# EAGLE board TSF (EAGLE 6.5.0)
CIRCULAR-LAYOUT-SETTINGS: 0.000000 0.000000 1.000000 10.000000 0 0
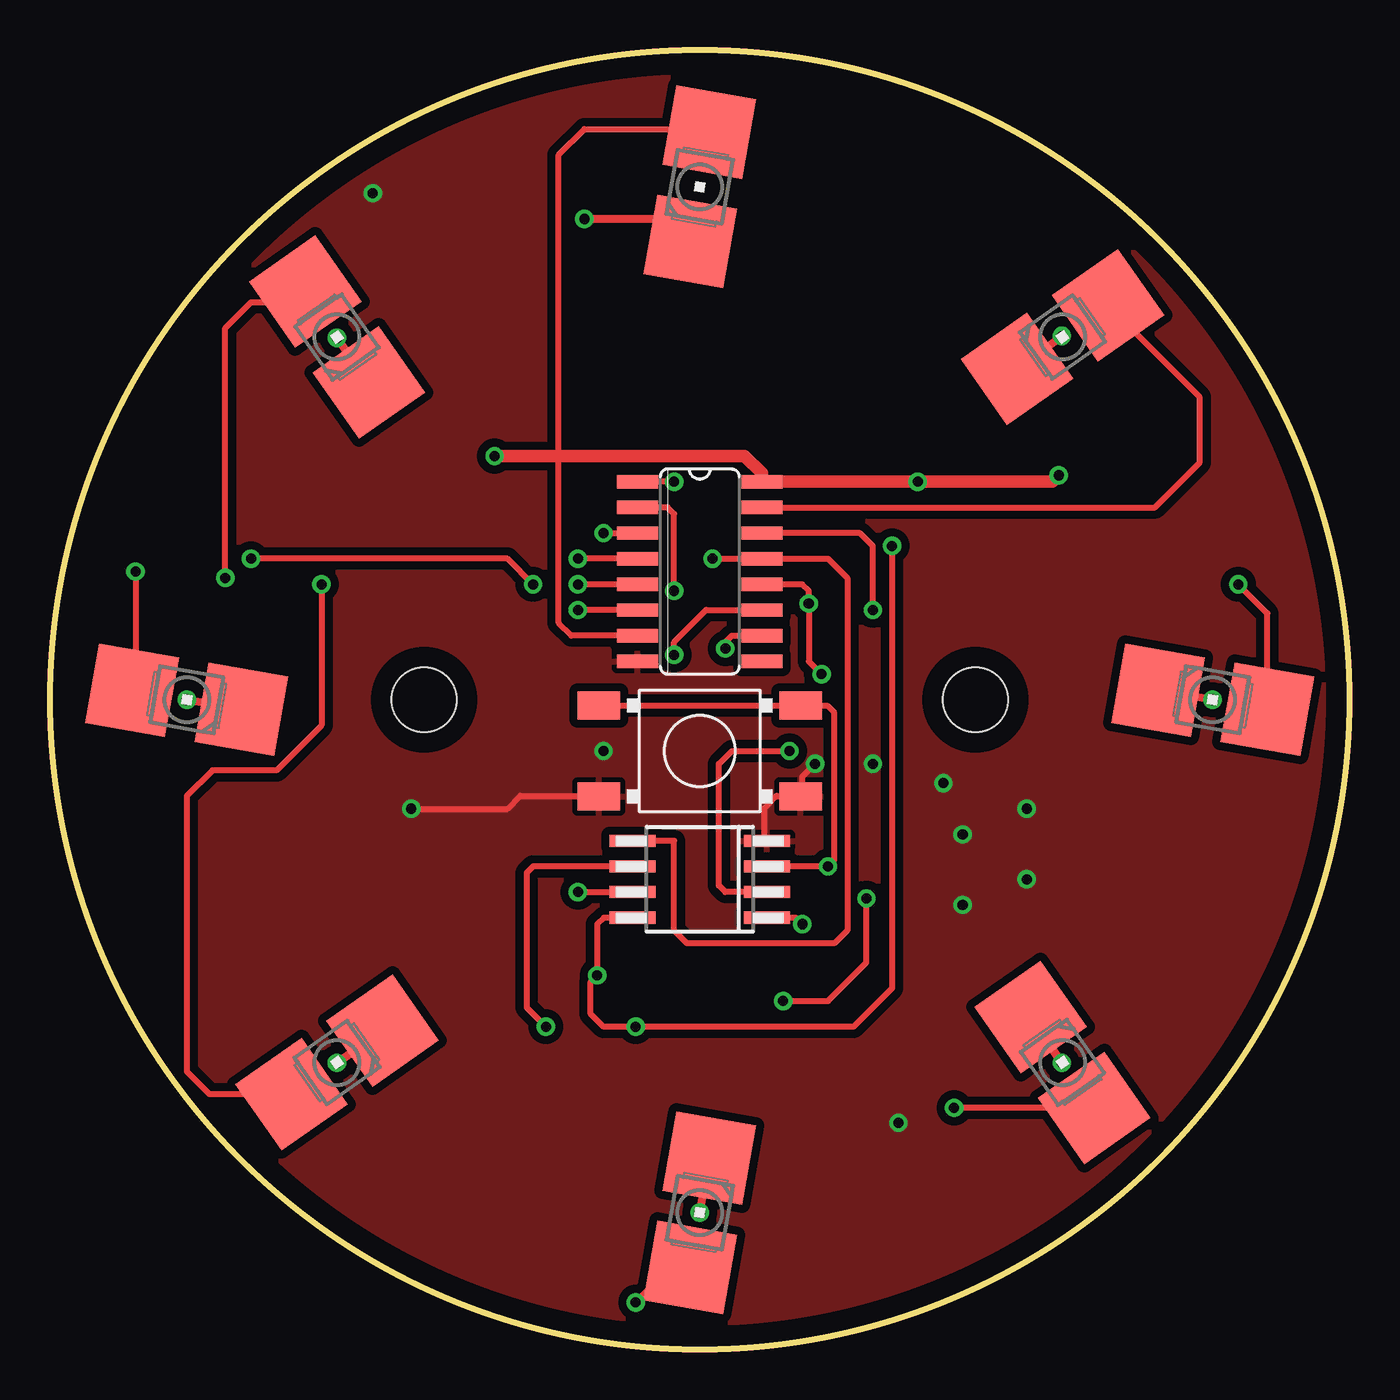
[diagram p0: board, top side]
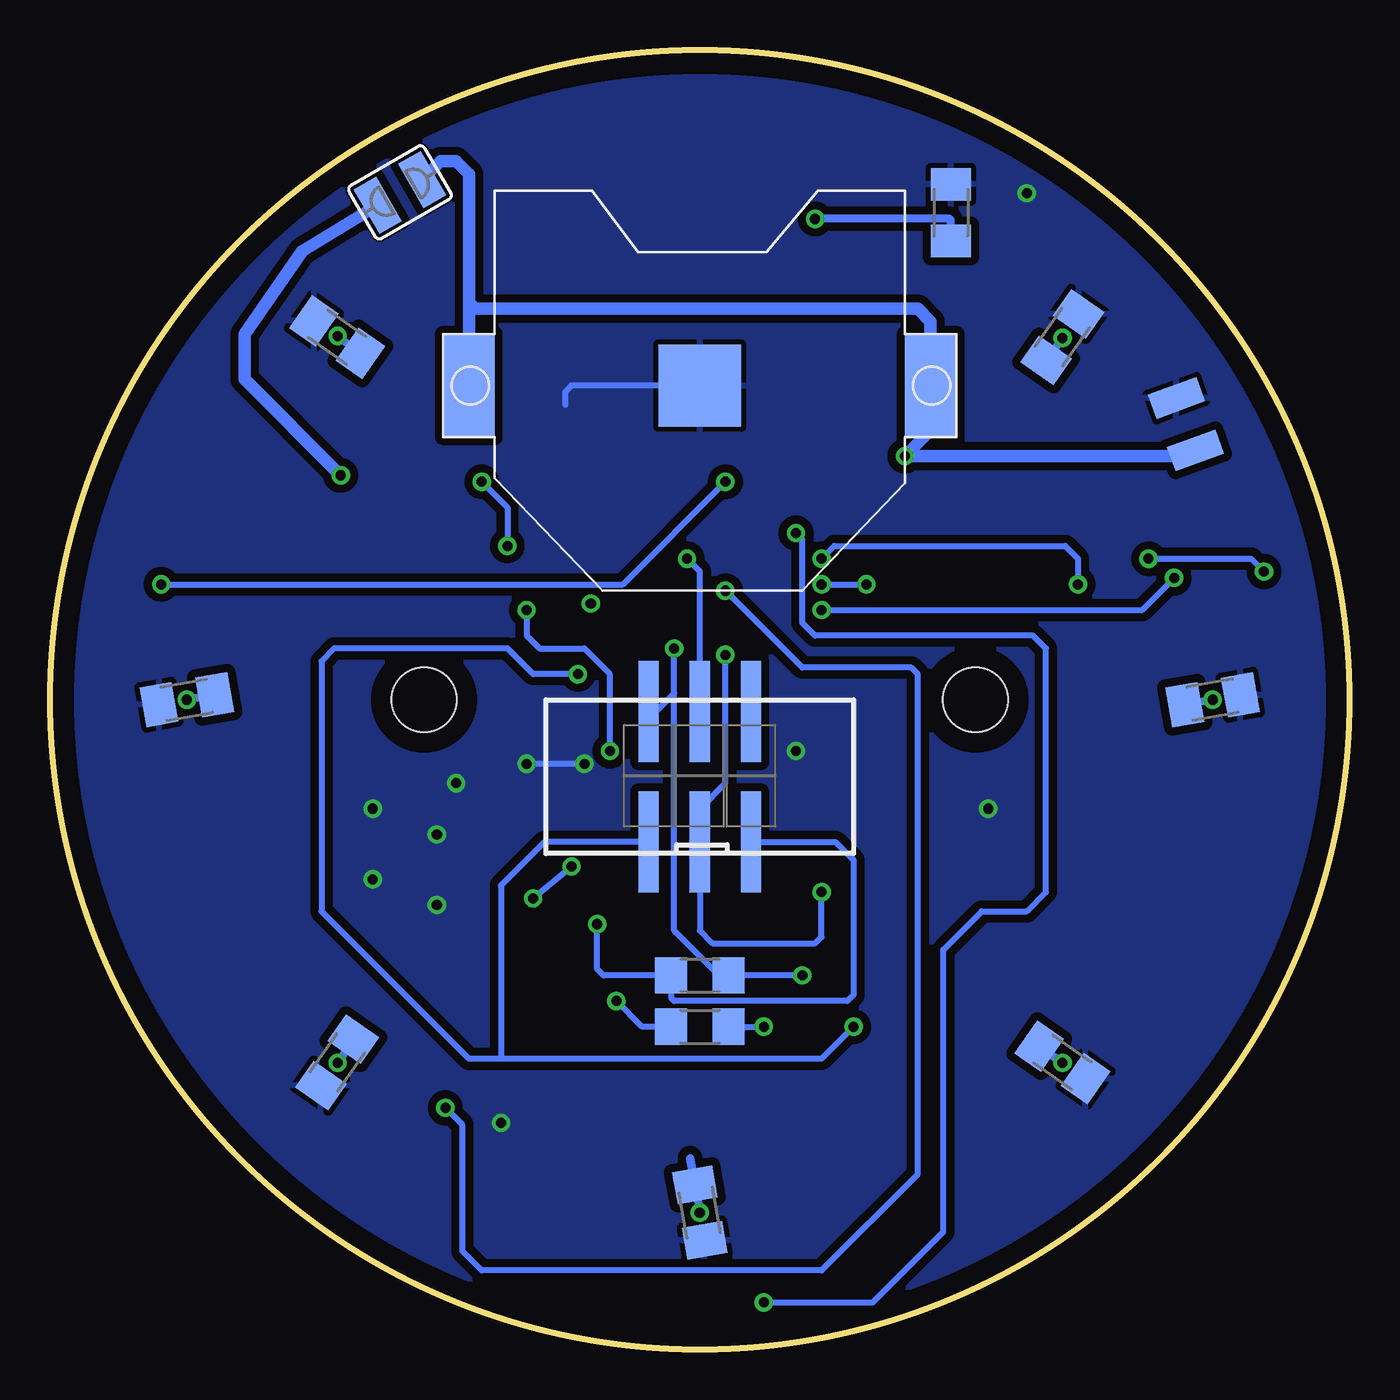
[diagram p1: board, bottom side, seen from below]

Size 64.31 x 64.31 mm. Coordinates in mm from the lower left corner, seen from the top.
Outline: circle at 32.15,32.15 radius 32.15
Copper layers (1*16): Top 0.035mm / dielectric 1.5mm / Bottom 0.035mm
Design rules "default": minimum track width 10mil, minimum drill 24mil, track to track 8mil, track to pad 8mil, pad to pad 8mil, via to via 8mil, smd to smd 8mil, copper to edge 40mil, drill to drill 8mil, minimum pad ring 10mil, minimum via ring 8mil, stop-mask expansion 4mil, vias tented up to drill 0mil, thermal gap 10mil
Holes 3.2 mm at 45.81,32.15 18.5,32.15

## Footprints (pad centres in the part's own frame; a part is rotated, then mirrored left to right if it is on the bottom)
SO16 = smd 0.66 x 2.032: 1 -4.445,-3.073; 2 -3.175,-3.073; 3 -1.905,-3.073; 4 -0.635,-3.073; 5 0.635,-3.073; 6 1.905,-3.073; 7 3.175,-3.073; 8 4.445,-3.073; 9 4.445,3.073; 10 3.175,3.073; 11 1.905,3.073; 12 0.635,3.073; 13 -0.635,3.073; 14 -1.905,3.073; 15 -3.175,3.073; 16 -4.445,3.073
P-LCC-2 = smd 4 x 4: A 0,2.75; C 0,-2.75
SMD1,27-2,54 = smd 1.27 x 2.54: 1 0,0
R1206 = smd 1.6 x 1.803: 1 -1.422,0; 2 1.422,0
M1206 = smd 1.6 x 2: 1 -1.4,0; 2 1.4,0
SJW = smd 1.27 x 2.54: 1 -1.27,0; 2 1.27,0
B3S-1002P = smd 2.1 x 1.4: 1 5,-2.25; 2 -5,-2.25; 3 5,2.25; 4 -5,2.25
CR2032-SMD = smd 2.54 x 5.08: +$1 -11.43,0; +$2 11.43,0 | smd 4.064 x 4.064: - 0,0
SOIC8_EIAJ_208MIL = smd 0.6 x 2.286: 1 -1.905,-3.33; 2 -0.635,-3.33; 3 0.635,-3.33; 4 1.905,-3.33; 5 1.905,3.33; 6 0.635,3.33; 7 -0.635,3.33; 8 -1.905,3.33
WSL_SMD = smd 1 x 5: 1 -2.54,-3.24; 2 -2.54,3.24; 3 0,-3.24; 4 0,3.24; 5 2.54,-3.24; 6 2.54,3.24

## Placement (x,y rotation side)
IC1  [SO16]  32.15,38.5 270 top
LED1  [P-LCC-2]  50.11,50.11 305 top
LED2  [P-LCC-2]  57.55,32.15 260 top
LED3  [P-LCC-2]  50.11,14.19 215 top
LED4  [P-LCC-2]  32.15,6.75 170 top
LED5  [P-LCC-2]  14.19,14.19 125 top
LED6  [P-LCC-2]  6.75,32.15 80 top
LED7  [P-LCC-2]  14.19,50.11 35 top
LED8  [P-LCC-2]  32.15,57.55 350 top
PAD1  [SMD1,27-2,54]  7.61,44.5 110 bottom
PAD2  [SMD1,27-2,54]  8.55,47.1 110 bottom
R1  10k  [R1206]  32.15,18.5 180 bottom
R2  [M1206]  50.11,50.11 145 bottom
R3  [M1206]  57.55,32.15 190 bottom
R4  [M1206]  50.11,14.19 235 bottom
R5  [M1206]  32.15,6.75 280 bottom
R6  [M1206]  14.19,14.19 325 bottom
R7  [M1206]  6.75,32.15 10 bottom
R8  [M1206]  14.19,50.11 55 bottom
R9  [M1206]  19.72,56.28 90 bottom
R10  10k  [R1206]  32.15,15.96 180 bottom
SJ1  [SJW]  47,57.28 210 bottom
T1  OMRON-B3S-1002P  [B3S-1002P]  32.15,29.61 180 top
U1  [CR2032-SMD]  32.15,47.71 0 bottom
U2  ATTINY85-S  [SOIC8_EIAJ_208MIL]  32.15,23.26 90 top
U$1  [25X25_BEST]  21.36,8.66 150 top
XW1  [WSL_SMD]  32.15,28.34 0 bottom

## Library data of the parts
IC1 = 74_er Reihe (DIN Europa)
LED1-LED8 = led
PAD1 PAD2 = wirepad
R1-R10 = rcl
SJ1 = jumper
T1 = Taster - Omron B3S-1002P
U1 = cr2032
U2 = _hhn_attiny25_45_85
U$1 = !!!Platinen_Logo!!!
XW1 = Atmel - ISP_6   (AVR ISP MKII)

## Nets
AGND: IC1.8 PAD2.1 R2.2 R3.2 R4.2 R5.2 R6.2 R7.2 R8.2 R9.2 T1.3 T1.4 U1.- U2.4
DATA0: IC1.15 LED1.A
DATA1: IC1.1 LED2.A
DATA2: IC1.2 LED3.A
DATA3: IC1.3 LED4.A
DATA4: IC1.4 LED5.A
DATA5: IC1.5 LED6.A
DATA6: IC1.6 LED7.A
DATA7: IC1.7 LED8.A
GND: XW1.6
N$1: SJ1.1 U1.+$1 U1.+$2
N$6: LED1.C R2.1
N$7: LED2.C R3.1
N$8: LED3.C R4.1
N$9: LED4.C R5.1
N$10: LED5.C R6.1
N$11: LED6.C R7.1
N$12: LED7.C R8.1
N$13: LED8.C R9.1
PORTB.0: IC1.13 U2.5 XW1.4
PORTB.1: IC1.12 U2.6 XW1.1
PORTB.2: IC1.11 U2.7 XW1.3
PORTB.3: IC1.14 U2.2
PORTB.4: R10.2 T1.1 T1.2 U2.3
PORTB.5: R1.2 U2.1 XW1.5
VCC: IC1.10 IC1.16 PAD1.1 R1.1 R10.1 SJ1.2 U2.8 XW1.2

## Tracks (layer width: path | path; a pad name or v marks a point on that pad's centre or on a via)
AGND  (via drill 0.5)
  Top 0.305: T1.4 35.94,27.36 | 35.94,27.36 35.33,26.76 35.33,25.32 U2.4 | v17.87,26.76 22.63,26.76 23.26,27.39 27.13,27.39 T1.3 | 35.94,27.36 35.96,27.39 37.23,27.39 37.23,28.34 v37.87,28.98
  Bottom 0.305: U1.- 38.5,47.71 38.82,47.39 38.82,46.76 | v37.87,28.98 v40.73,28.98
  other vias: 42,11.2 15.96,57.24 27.39,29.61 48.35,26.76 45.17,25.49 44.22,28.03 48.35,23.26 45.17,21.99
  pour Top (isolate 0.406): 64.54,64.54 0.09,64.54 0.09,-0.23 64.54,-0.23
  pour Bottom (isolate 0.406): 64.54,64.54 0.09,64.54 0.09,-0.23 64.54,-0.23
DATA0
  Top 0.254: LED1.A 54.21,51.69
  Top 0.305: IC1.15 54.7,41.68 56.92,43.9 56.92,47.14 LED1.A
DATA1  (via drill 0.5)
  Top 0.305: LED2.A 60.26,36.43 v58.82,37.87 | v30.88,42.95 IC1.1
  Top 0.406: 61.05,32.46 LED2.A
  Bottom 0.305: v58.82,37.87 35.96,37.87 v30.88,42.95
DATA2  (via drill 0.5)
  Top 0.305: v30.88,37.55 30.88,41.36 30.57,41.68 IC1.2 | LED3.A v44.75,11.94
  Bottom 0.305: v30.88,37.55 27.07,33.74 21.68,33.74 21.36,33.42 21.36,8.66 26.12,3.9 42.95,3.9 43.9,4.85 43.9,11.09 v44.75,11.94
DATA3  (via drill 0.5)
  Top 0.305: LED4.A 30.72,4.05 v28.98,2.31 | v27.39,40.41 IC1.3
  Bottom 0.305: v28.98,2.31 23.58,2.31 20.09,5.8 20.09,19.77 18.18,21.68 15.96,21.68 15.01,22.63 15.01,34.69 15.64,35.33 26.44,35.33 27.07,35.96 27.07,40.09 v27.39,40.41
DATA4  (via drill 0.5)
  Top 0.305: IC1.4 v26.12,39.14 | LED5.A 7.88,12.62 6.75,13.74 6.75,27.39 8.02,28.66 11.2,28.66 13.42,30.88 v13.42,37.87
  Bottom 0.305: v26.12,39.14 25.49,39.77 14.06,39.77 13.42,39.14 v13.42,37.87
DATA5  (via drill 0.5)
  Top 0.305: IC1.5 v26.12,37.87 | v4.21,38.5 4.21,32.8 LED6.A | v23.9,37.87 22.63,39.14 v9.93,39.14
  Bottom 0.305: v26.12,37.87 v23.9,37.87 | v9.93,39.14 4.85,39.14 v4.21,38.5
DATA6  (via drill 0.5)
  Top 0.305: IC1.6 v26.12,36.6 | v8.66,38.19 8.66,50.57 9.93,51.84 12.09,51.84 LED7.A
  Bottom 0.305: v26.12,36.6 10.25,36.6 v8.66,38.19
DATA7
  Top 0.305: IC1.7 25.8,35.33 25.17,35.96 25.17,59.14 26.44,60.41 32.48,60.41 LED8.A
N$1
  Bottom 0.61: U1.+$1 43.58,51.84 | 43.58,51.84 43.58,58.19 44.22,58.82 44.99,58.82 SJ1.1 | U1.+$2 20.72,50.89 21.36,51.52 43.27,51.52 43.58,51.84
N$6  (via drill 0.5)
  Top 0.406: 48.66,47.39 48.66,47.73 LED1.C v50.09,50.17
  Bottom 0.406: R2.1 v50.09,50.17
N$7  (via drill 0.5)
  Top 0.406: 54.38,32.16 LED2.C v57.55,32.15
  Bottom 0.406: R3.1 v57.55,32.15
N$8  (via drill 0.5)
  Top 0.406: v50.09,14.17 LED3.C
  Top 0.813: 47.42,15.33 LED3.C
  Bottom 0.406: R4.1 v50.09,14.17
N$9  (via drill 0.5)
  Top 0.406: v32.15,6.75 LED4.C
  Top 0.813: 32.46,9.29 LED4.C
  Bottom 0.406: R5.1 LED4.C v32.15,6.75
N$10  (via drill 0.5)
  Top 0.406: v14.19,14.17 LED5.C
  Top 0.813: 16.91,16.28 16.91,16.24 LED5.C
  Bottom 0.406: R6.1 v14.19,14.17
N$11  (via drill 0.5)
  Top 0.406: 9.61,31.83 LED6.C v6.75,32.15
  Bottom 0.406: v6.75,32.15 R7.1
N$12  (via drill 0.5)
  Top 0.406: v14.19,50.07 LED7.C
  Bottom 0.406: R8.1 v14.19,50.07
N$13  (via drill 0.5)
  Top 0.406: 31.83,54.7 LED8.C 30.56,55.97 v26.44,55.97
  Bottom 0.406: R9.1 19.72,55.91 19.77,55.97 v26.44,55.97
PORTB.0  (via drill 0.5)
  Top 0.305: v32.79,39.14 IC1.13 38.5,39.14 39.46,38.19 39.46,20.72 38.82,20.09 31.52,20.09 30.88,20.72 30.88,25.17 U2.5
  Bottom 0.305: XW1.4 32.15,38.5 v32.79,39.14
PORTB.1  (via drill 0.5)
  Top 0.305: IC1.12 37.23,37.87 37.55,37.55 v37.55,36.92 37.55,34.06 v38.19,33.42 | U2.6 23.9,23.9 23.58,23.58 23.58,16.91 v24.53,15.96
  Bottom 0.305: v24.53,15.96 26.12,14.37 42,14.37 | 42,14.37 43.58,14.37 50.89,21.68 50.89,34.06 50.25,34.69 41.68,34.69 40.41,33.42 v38.19,33.42 | XW1.1 39.84,25.1 42,22.95 42,14.37
PORTB.2  (via drill 0.5)
  Top 0.305: v26.12,22.63 U2.7 | v30.88,34.38 30.88,35.01 32.47,36.6 IC1.11
  Bottom 0.305: v26.12,22.63 26.12,20.41 26.44,20.09 31.52,20.09 32.15,20.72 XW1.3 32.15,26.76 30.88,28.03 v30.88,34.38
PORTB.3  (via drill 0.5)
  Top 0.305: U2.2 33.42,22.63 33.11,22.95 33.11,28.98 33.74,29.61 v36.6,29.61 | v40.73,36.6 40.73,39.77 40.09,40.41 IC1.14
  Bottom 0.305: v36.6,29.61 36.6,33.42 37.87,34.69 40.09,34.69 40.73,35.33 v40.73,36.6
PORTB.4  (via drill 0.5)
  Top 0.305: T1.1 T1.2 37.18,31.84 38.5,31.84 38.82,31.52 38.82,24.22 v38.5,23.9 U2.3 | v36.28,17.23 38.5,17.23 40.41,19.14 v40.41,22.31
  Bottom 0.305: R10.2 35.01,15.96 v36.28,17.23 | v40.41,22.31 v38.5,23.9
PORTB.5  (via drill 0.5)
  Top 0.305: 35.33,21.2 U2.1 36.92,21.36 v37.23,21.04
  Bottom 0.305: XW1.5 25.42,25.1 24.53,24.22 24.53,17.55 24.85,17.23 33.42,17.23 33.58,17.38 R1.2 36.92,18.5 37.23,18.82 v37.23,21.04
VCC  (via drill 0.5)
  Top 0.305: v33.42,34.69 33.42,35.01 33.74,35.33 IC1.10 | v41.68,39.77 41.68,17.87 39.77,15.96 v28.98,15.96 27.39,15.96 26.76,16.6 26.76,18.18 v27.07,18.5 27.07,21.04 27.39,21.36 U2.8
  Top 0.61: v21.99,44.22 34.38,44.22 35.23,43.37 IC1.16 v42.95,42.95 49.62,42.95 v49.93,43.27
  Bottom 0.305: XW1.2 34.31,31.58 33.42,32.47 | 33.42,32.47 v33.42,34.69 | 33.42,32.47 33.42,20.72 31.2,18.5 R1.1 v27.07,18.5 | v42.95,42.95 41.68,41.68 v41.68,39.77 | R10.1 v28.98,15.96
  Bottom 0.61: 20.72,45.49 v21.99,44.22 8.52,44.22 PAD1.1 | SJ1.2 51.84,54.38 54.7,50.25 54.7,48.03 v49.93,43.27

## Text on the board
Bestueckungsdruck: Modus